# Altium PCB toasterLittleBoard.PcbDoc
Units mil, origin at the board's own origin, x right, y up, seen from the top; angles counter-clockwise.
Board outline 2400.95 x 435.01 mil, 2 copper layers (Top Layer, Bottom Layer); 6 components, 2 nets, 8 pads, 0 vias.
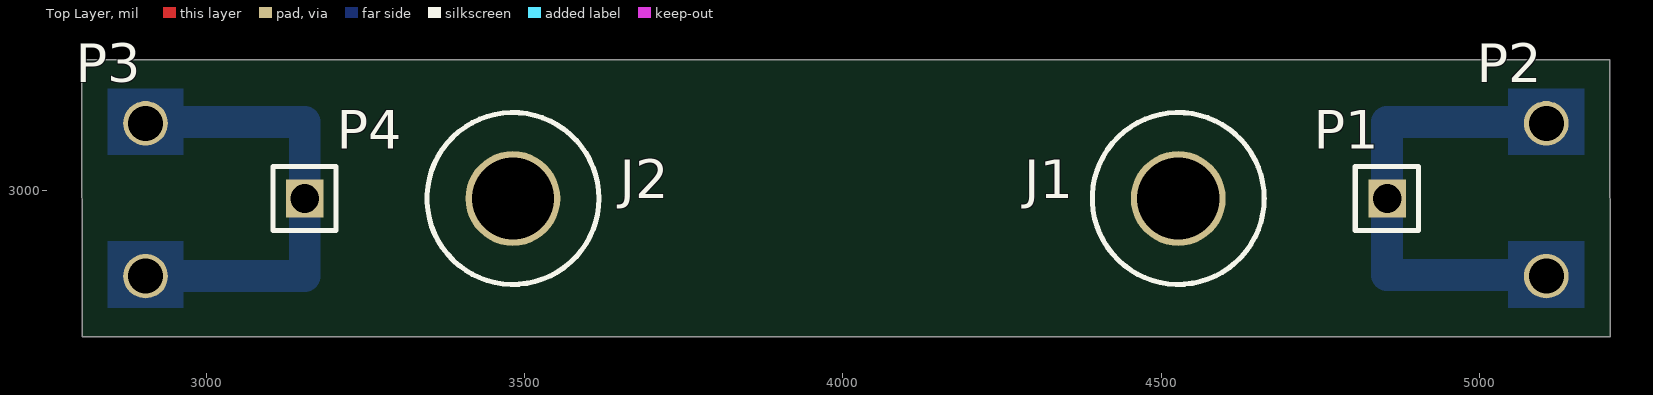
[diagram p0: Top Layer view]
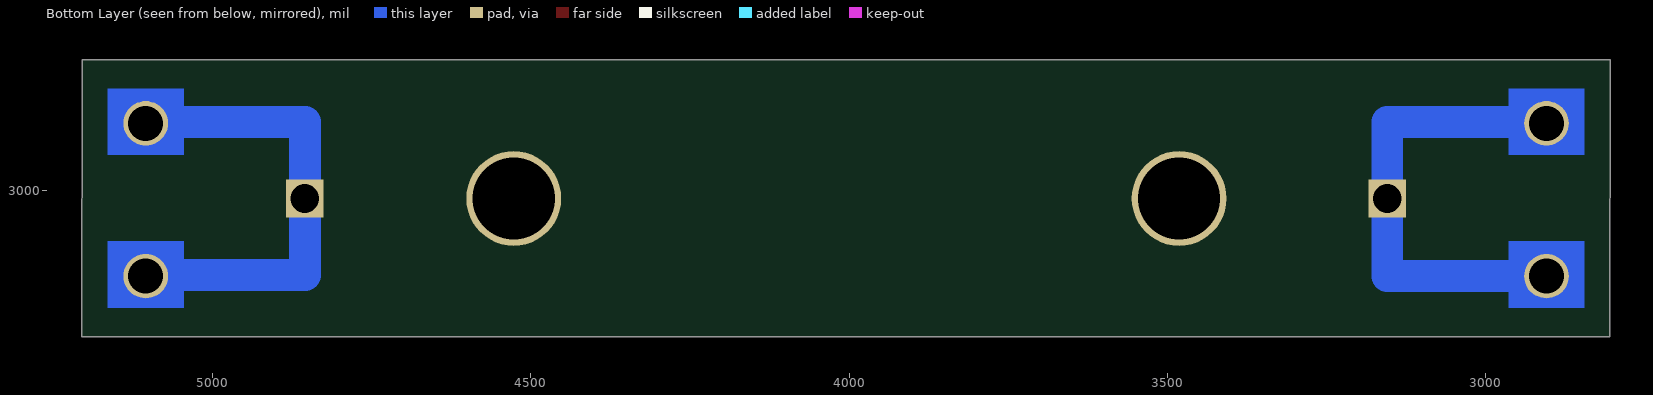
[diagram p1: Bottom Layer view, seen from below]

## Layer stack, top to bottom
Top Layer: signal copper 1.4
Dielectric: dielectric 12.6, FR-4, Dk 4.8
Bottom Layer: signal copper 1.4

## Board outline
2805.66,2770 5205.64,2769.99 5204.66,3204.99 2804.69,3205

## Design rules (kind name [scope] priority, off if disabled: settings)
Clearance [All] p1: gap=10
PolygonConnect [All] p1: connectstyle=Relief reliefconductorwidth=10 reliefentries=4 polygonreliefangle="90 Angle"
RoutingVias [All] p1: holewidth=28 width=50 viastyle="Through Hole" minholewidth=28 minwidth=50 maxholewidth=28 maxwidth=50
SilkscreenOverComponentPads [All] p1: minsilkscreentomaskgap=10
SolderMaskExpansion [All] p1: expansion=4
Width "Schematic Width Constraint_1" [InNet('GND')] p1: maxlimit=200 minlimit=50 preferedwidth=125 minimp=50.000000 maximp=50.000000 favimp=50.000000
Width "Schematic Width Constraint" [InNet('VCC')] p2: maxlimit=200 minlimit=50 preferedwidth=125 minimp=50.000000 maximp=50.000000 favimp=50.000000
Width [All] p3: maxlimit=10 minlimit=10 preferedwidth=10
27 further rules are at their usual default settings.

## Components (designator, comment, footprint, x,y, rotation, side; value= is the part's Value field where it differs from the comment)
J1 "Mechanical_Hole" #4_Screw_Hole 4527,2987 r0 top
J2 "Mechanical_Hole" #4_Screw_Hole 3482,2987 r0 top
P1 "Header 1x1" HDR1X1 4855,2987 r0 top
P2 "BATTCLIP_51K" BATTCLIP_51K 5105,2985 r0 top
P3 "BATTCLIP_51K" BATTCLIP_51K 2905,2985 r0 top
P4 "Header 1x1" HDR1X1 3155,2987 r0 top

## Footprints (in the part's own frame and the unit in brackets; to place one, negate y for a bottom-side part, rotate by r counter-clockwise, add the part's x,y. Pads: shape width x height; smd on the part's side, far side on the other; paste and mask are expansions set on the pad)
#4_Screw_Hole [mil] "#4 Screw Hole, 3.2766mm Hole Dia., Plated"
  round 149 hole 129: 1(0,0)
  silkscreen extent -135,-135 135,135
BATTCLIP_51K [mil] "This is the connector for the toaster charger board."
  round 70 hole 55: 1(0,120) 2(0,-120)
  body extent -119,-120 120,120, height 240
HDR1X1 [mm] "Way of designating a single hole which is meant to have an electrical connection"
  rect 1.5x1.5 hole 1.143: 1(0,0)
  silkscreen extent -1.27,-1.27 1.24,1.27

## Part data
J1 J2: "A mechanical hole for mounting the board"

## Nets (pads, with @x,y where several pads share a name; then routed paths per layer and width w, separated by ;. In a path a pad name is that pad's centre, name@x,y a point inside that pad or via, vN(x,y) a via of type N, cw(c..) or ccw(c..) an arc to the next point about the centre after c; other vN are vias at no path point)
GND: P3.1 P3.2 P4.1 | length 742.8
  Bottom Layer w50: P3.2@2905,2867 2907,2865 3155,2865 P4.1 3155,3107 P3.1@2905,3107
VCC: P1.1 P2.1 P2.2 | length 740
  Bottom Layer w50: P2.2@5105,2867 4855,2867 P1.1 4855,3107 P2.1@5105,3107
pads on no net: J1.1 J2.1

## Other copper
Bottom Layer:
  rectangle net VCC: 5045,2815 5165,2920
  rectangle net VCC: 5045,3055 5165,3160
  rectangle net GND: 2845,2815 2965,2920
  rectangle net GND: 2845,3055 2965,3160